# Altium PCB VCA.PcbDoc
Units mm, origin at the board's own origin, x right, y up, seen from the top; angles counter-clockwise.
Board outline 73 x 110 mm, 2 copper layers (Top Layer, Bottom Layer); 61 components, 35 nets, 170 pads, 0 vias.
Unrouted connection lines stored in the file: 34.
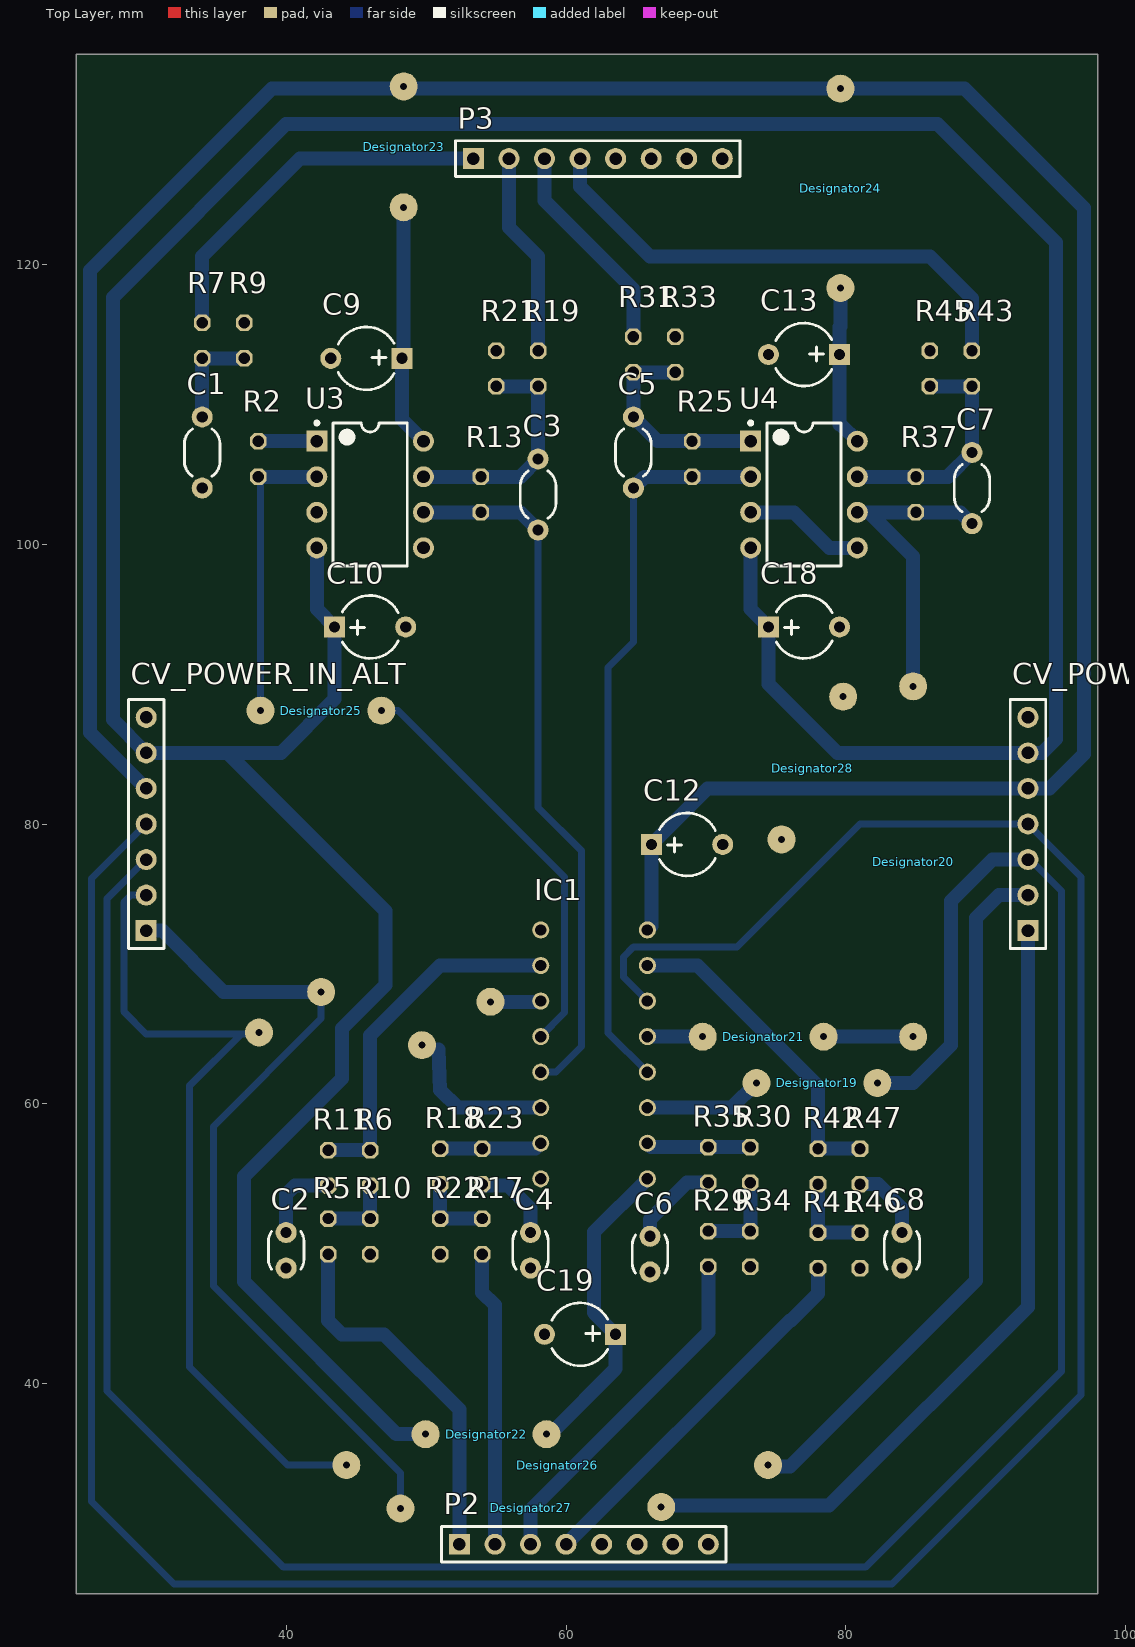
[diagram p0: Top Layer view]
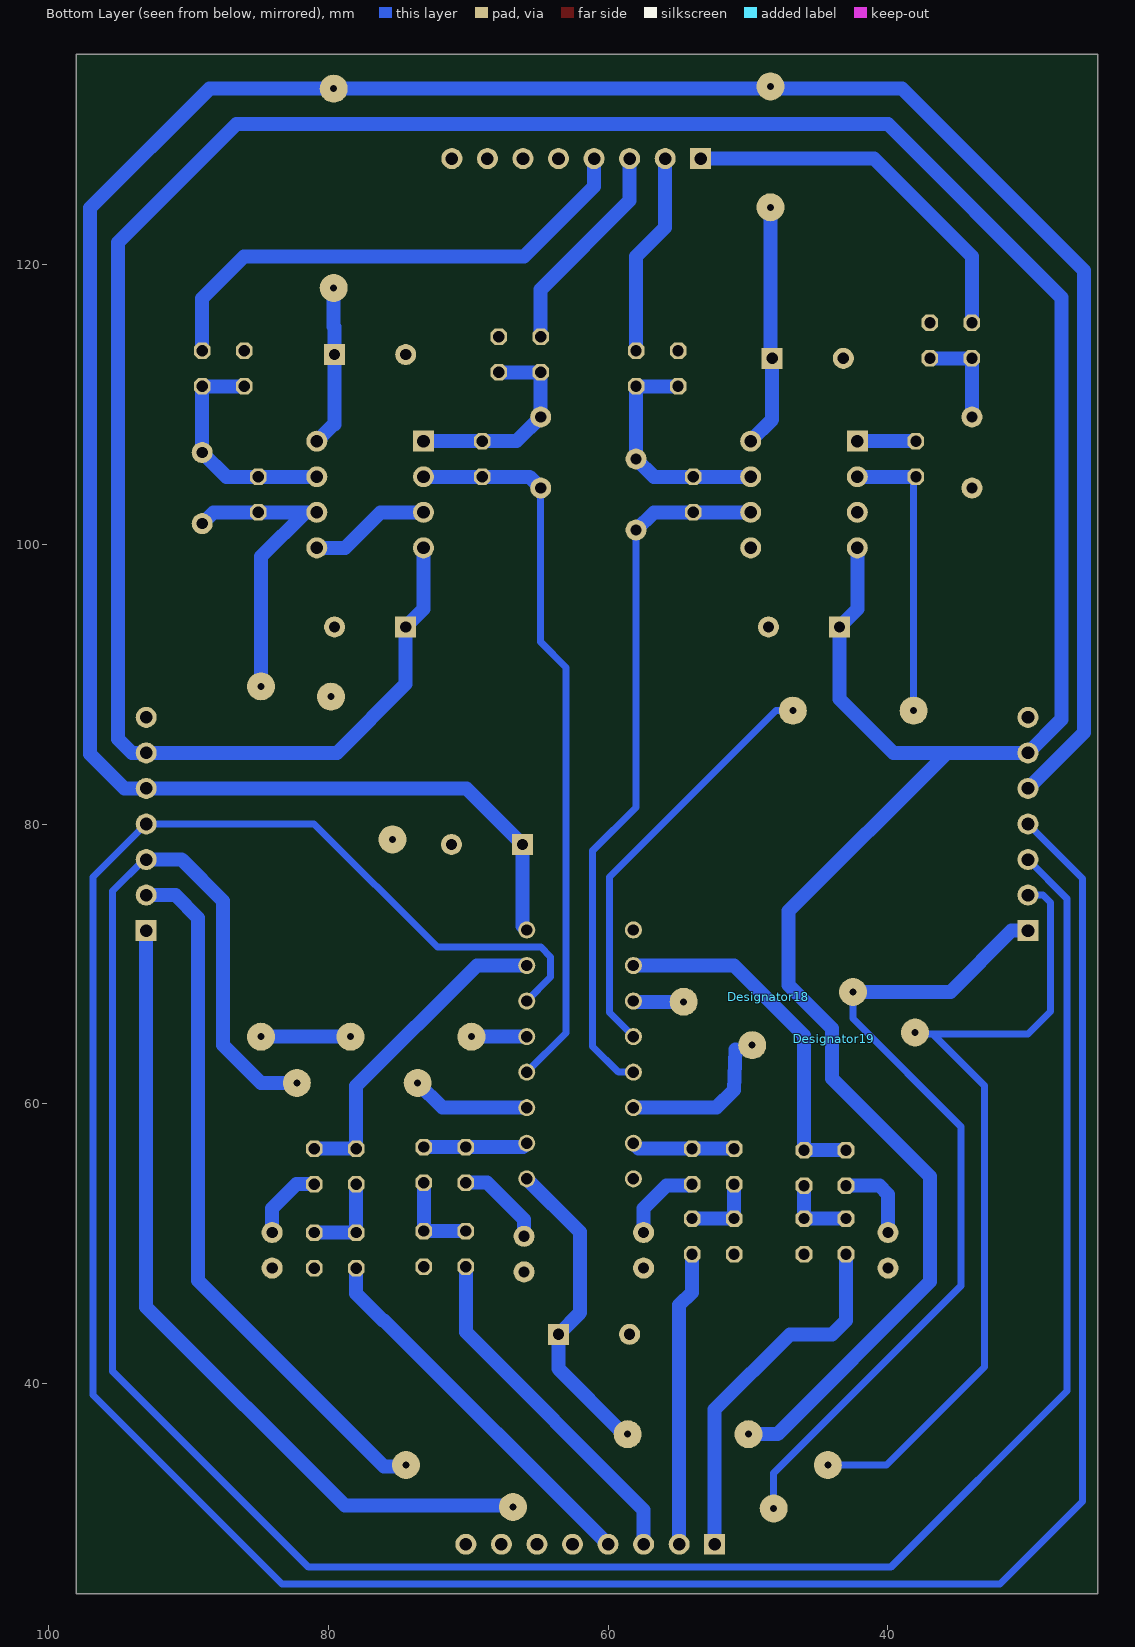
[diagram p1: Bottom Layer view, seen from below]

## Layer stack, top to bottom
Top Solder: solder mask 0.0102, Solder Resist, Dk 3.5
Top Layer: signal copper 0.0356
Dielectric 1: dielectric 0.32, FR-4, Dk 4.8
Bottom Layer: signal copper 0.0356
Bottom Solder: solder mask 0.0102, Solder Resist, Dk 3.5

## Board outline
25,25 25,135 98,135 98,25

## Design rules (kind name [scope] priority, off if disabled: settings)
Clearance Clearance_1 [InPolygon] p1: gap=0.5 ignorepadtopadclearanceinfootprint=FALSE
Clearance [All] p2: gap=0.254 ignorepadtopadclearanceinfootprint=FALSE except(0: Arc-Hole Track-Hole SMDPad-Hole THPad-Hole Via-Hole Fill-Hole Poly-Hole Region-Hole Text-Hole)
ComponentClearance [All] p1: gap=0 collisioncheckmode=3 verticalgap=0.254 showdistances=FALSE
PolygonConnect [All] p1: connectstyle=Relief reliefconductorwidth=0.254 reliefentries=4 polygonreliefangle="90 Angle" airgapwidth=0.254
RoutingVias [All] p1: holewidth=0.711 width=1.27 viastyle="Through Hole" minholewidth=0.711 minwidth=1.27 maxholewidth=0.711 maxwidth=1.27
SolderMaskExpansion [All] p1: expansion=0.102
Width [All] p1: maxlimit=2 minlimit=0.254 preferedwidth=1
29 further rules are at their usual default settings.

## Classes and differential pairs
component class VCA: C1 C2 C3 C4 C5 C6 C7 C8 C9 C10 C12 C13 C18 C19 CV_POWER_IN CV_POWER_IN_ALT IC1 P2 P3 R2 R5 R6 R7 R9 R10 R11 R13 R17 R18 R19 R21 R22 R23 R25 R29 R30 R31 R33 R34 R35 R37 R41 R42 R43 R45 R46 R47 U3 U4

## Components (designator, comment, footprint, x,y, rotation, side; value= is the part's Value field where it differs from the comment)
C1 "100pF" CAPRR508-254X381X584 34,106.54 r90 top
C2 "560pF" CAPRR254-254X381X381 40,49.54 r90 top
C3 "100pF" CAPRR508-254X381X584 58,103.54 r90 top
C4 "560pF" CAPRR254-254X381X381 57.46,49.54 r90 top
C5 "100pF" CAPRR508-254X381X584 64.81,106.54 r90 top
C6 "560pF" CAPRR254-254X381X381 66,49.27 r90 top
C7 "100pF" CAPRR508-254X381X584 89,104 r90 top
C8 "560pF" CAPRR254-254X381X381 84,49.54 r90 top
C9 "0.1uF" CAPPRB508-450x850 45.73,113.27 r180 top
C10 "0.1uF" CAPPRB508-450x850 46,94.08 r0 top
C12 "0.1uF" CAPPRB508-450x850 68.65,78.54 r0 top
C13 "0.1uF" CAPPRB508-450x850 77,113.54 r180 top
C18 "0.1uF" CAPPRB508-450x850 77,94.08 r0 top
C19 "0.1uF" CAPPRB508-450x850 61,43.54 r180 top
CV_POWER_IN "Header 7" HDR1X7 93,72.38 r90 top
CV_POWER_IN_ALT "Header 7" HDR1X7 30,72.38 r90 top
Designator18 "Comment" Jumper#1 51.136,68 r180 bottom
Designator19 "Comment" Jumper#2 73.6,61.5 r0 top
Designator19 "Comment" Jumper#3 46.7,65.1 r180 bottom
Designator20 "Comment" Jumper#4 84.8,81.2 r90 top
Designator21 "Comment" Jumper#2 78.4,64.8 r180 top
Designator22 "Comment" Jumper#2 58.6,36.4 r180 top
Designator23 "Comment" Jumper#2 48.4,132.7 r270 top
Designator24 "Comment" Jumper#5 79.6,118.3 r90 top
Designator25 "Comment" Jumper#2 46.8,88.1 r180 top
Designator26 "Comment" Jumper#6 74.436,34.2 r180 top
Designator27 "Comment" Jumper#7 56.8,31.1 r180 top
Designator28 "Comment" Jumper#8 79.8,89.1 r270 top
IC1 "SSM2164P" DIL16 62,63.54 r270 top
P2 "Header 8" HDR1X8 52.38,28.54 r0 top
P3 "Header 8" HDR1X8 53.38,127.54 r0 top
R2 "Res1" 0207/2V 38,106.08 r270 top value=1K
R5 "Res1" 0207/2V 43,50.54 r90 top value=1K
R6 "Res1" 0207/2V 46,55.43 r90 top value=1K
R7 "Res1" 0207/2V 34,114.54 r270 top value=1K
R9 "Res1" 0207/2V 37,114.54 r270 top value=1K
R10 "Res1" 0207/2V 46,50.54 r90 top value=1K
R11 "Res1" 0207/2V 43,55.43 r90 top value=1K
R13 "Res1" 0207/2V 53.92,103.54 r270 top value=1K
R17 "Res1" 0207/2V 54,50.54 r90 top value=1K
R18 "Res1" 0207/2V 51,55.54 r90 top value=1K
R19 "Res1" 0207/2V 58,112.54 r270 top value=1K
R21 "Res1" 0207/2V 55,112.54 r270 top value=1K
R22 "Res1" 0207/2V 51,50.54 r90 top value=1K
R23 "Res1" 0207/2V 54,55.54 r90 top value=1K
R25 "Res1" 0207/2V 69,106.08 r270 top value=1K
R29 "Res1" 0207/2V 70.16,49.65 r90 top value=1K
R30 "Res1" 0207/2V 73.16,55.65 r90 top value=1K
R31 "Res1" 0207/2V 64.81,113.54 r270 top value=1K
R33 "Res1" 0207/2V 67.81,113.54 r270 top value=1K
R34 "Res1" 0207/2V 73.16,49.65 r90 top value=1K
R35 "Res1" 0207/2V 70.16,55.65 r90 top value=1K
R37 "Res1" 0207/2V 85,103.54 r270 top value=1K
R41 "Res1" 0207/2V 78,49.54 r90 top value=1K
R42 "Res1" 0207/2V 78,55.54 r90 top value=1K
R43 "Res1" 0207/2V 89,112.54 r270 top value=1K
R45 "Res1" 0207/2V 86,112.54 r270 top value=1K
R46 "Res1" 0207/2V 81,49.54 r90 top value=1K
R47 "Res1" 0207/2V 81,55.54 r90 top value=1K
U3 "TL082CN" STM-N8 46,103.54 r0 top
U4 "TL082CN" STM-N8 77,103.54 r0 top

## Footprints (in the part's own frame and the unit in brackets; to place one, negate y for a bottom-side part, rotate by r counter-clockwise, add the part's x,y. Pads: shape width x height; smd on the part's side, far side on the other; paste and mask are expansions set on the pad)
0207/2V [mil]
  oct 46.48x46.48 / inner oct 60x60 / far side oct 46.48x46.48 hole 32: 1(-50,0) 2(50,0)
CAPPRB508-450x850 [mm] "Capacitor, Polarized Radial Bead, Pin spacing 5.08mm - Body Diameter 4.5mm X Body Height 8.5mm"
  rect 1.5x1.5 hole 0.8: 1(-2.54,0)
  round 1.5 hole 0.8: 2(2.54,0)
  silkscreen extent -1.98,-2.25 2.01,2.25, body extent -2.79,-2.25 2.79,2.25, height 8.97
CAPRR254-254X381X381 [mm] "Capacitor Radial Rounded, Pin spacing 2.54mm - Body With 2.54mm X Body Length 3.81mm X Body Height 3.81mm"
  round 1.5 hole 0.8: 1(-1.27,0) 2(1.27,0)
  silkscreen extent -1.35,-1.27 1.35,1.27, body extent -1.9,-1.27 1.91,1.27, height 3.81
CAPRR508-254X381X584 [mm] "Capacitor Radial Rounded (KEMET C317), Pin spacing 5.08mm - Body With 2.54mm X Body Length 3.81mm X Body Height 5.84mm"
  round 1.5 hole 0.8: 1(-2.54,0) 2(2.54,0)
  silkscreen extent -1.69,-1.27 1.69,1.27, body extent -2.79,-1.27 2.79,1.27, height 5.84
DIL16 [mil]
  round 48 / inner round 60 / far side round 48 hole 32: 1(-350,-150) 2(-250,-150) 3(-150,-150) 4(-50,-150) 5(50,-150) 6(150,-150) 7(250,-150) 8(350,-150) 9(350,150) 10(250,150) 11(150,150) 12(50,150) 13(-50,150) 14(-150,150) 15(-250,150) 16(-350,150)
HDR1X7 [mm] "Connector; Header; 7 Position"
  rect 1.5x1.5 hole 0.9: 1(0,0)
  round 1.5 hole 0.9: 2(2.54,0) 3(5.08,0) 4(7.62,0) 5(10.16,0) 6(12.7,0) 7(15.24,0)
  silkscreen extent -1.27,-1.27 16.51,1.27
HDR1X8 [mm] "Connector; Header; 8 Position"
  rect 1.5x1.5 hole 0.9: 1(0,0)
  round 1.5 hole 0.9: 2(2.54,0) 3(5.08,0) 4(7.62,0) 5(10.16,0) 6(12.7,0) 7(15.24,0) 8(17.78,0)
  silkscreen extent -1.27,-1.27 19.05,1.27
Jumper#1 [mm]
  round 2 hole 0.5: 1(-3.464,-0.7) 1(8.636,0)
Jumper#2 [mm]
  round 2 hole 0.5: 1(0,0) 1(8.636,0)
Jumper#3 [mm]
  round 2 hole 0.5: 1(-3,-0.9) 1(8.636,0)
Jumper#4 [mm]
  round 2 hole 0.5: 1(-16.4,0) 1(8.636,0)
Jumper#5 [mm]
  round 2 hole 0.5: 1(0,0) 1(14.24,0)
Jumper#6 [mm]
  round 2 hole 0.5: 1(0,0) 1(30.136,0)
Jumper#7 [mm]
  round 2 hole 0.5: 1(-10,-0.1) 1(8.636,0)
Jumper#8 [mm]
  round 2 hole 0.5: 1(0,0) 1(10.2,-4.4)
STM-N8 [mm] "DIP, 8-Leads, Body 10.15x7.1mm, Pitch 2.54mm"
  rect 1.5x1.5 hole 0.9: 1(-3.81,3.81)
  round 1.5 hole 0.9: 2(-3.81,1.27) 3(-3.81,-1.27) 4(-3.81,-3.81) 5(3.81,-3.81) 6(3.81,-1.27) 7(3.81,1.27) 8(3.81,3.81)
  silkscreen extent -3.93,-5.1 2.65,5.23, body extent -3.95,-5.07 3.95,5.07, height 5.33

## Part data
C1 C3 C5 C7: library part CCR_100PF_100V_5%_C0G_508-254X381X584, "Non-polarised capacitor", Case="LS5.08 W2.54 x L3.81 x H5.84", Manufacturer=GENERIC, Manufacturer1 ComponentHeight=5.84mm, Manufacturer1 Example=KEMET, Manufacturer1 Part Number=C317C101J1G5TA, Tolerance=±5%, Voltage=100VDC, Author="CERN DEM JLC", ComponentHeight=5.84mm, Component Type=Standard, CreateDate=17/12/2008, HelpURL=\\cern.ch\dfs\Applications\Altium\Datasheets\CCR_KEMET_C317.pdf, LatestRevisionDate=16/04/2015, Manufacturer Part Number=CCR_100PF_100V_5%_C0G_508-254X381X584, Mounted=Yes, Part Description="Radial Lead Type Multilayer Ceramic Capacitor", Part Number=CCR_100PF_100V_5%_C0G_508-254X381X584, Pin Count=2, Sense=No, SMD=No, Socket=No, Status=None, TC=C0G
C2 C4 C6 C8: library part CCR_560PF_100V_5%_C0G_254-254X381X381, "Non-polarised capacitor", Case="LS2.54 W2.54 x L3.81 x H3.81", Manufacturer=AVX, Manufacturer Part Number=SR151A561JAA, Tolerance=±5%, Voltage=100VDC, Author="CERN DEM JLC", ComponentHeight=3.81mm, Component Type=Standard, CreateDate=17/11/2010, HelpURL=\\cern.ch\dfs\Applications\Altium\Datasheets\CCR_AVX_SR15.pdf, LatestRevisionDate=16/04/2015, Mounted=Yes, Part Description="Radial Lead Type Multilayer Ceramic Capacitor", Part Number=CCR_560PF_100V_5%_C0G_254-254X381X381, Pin Count=2, Sense=No, SMD=No, Socket=No, Status=None, TC=C0G
C9 C10 C12 C13 C18 C19: library part CTEB_0.1UF_35V_10%_508-450X850, "Polarised capacitor", Case="LS5.08 D4.5 x H8.5", Manufacturer=AVX, Manufacturer Part Number=TAP104M035CCS-LF, Tolerance=±10%, Voltage=35V, Author="CERN DEM JLC", ComponentHeight=8.5mm, Component Type=Standard, CreateDate=19/08/2010, HelpURL=\\cern.ch\dfs\Applications\Altium\Datasheets\CTEB_AVX_TAP.pdf, LatestRevisionDate=19/08/2010, Mounted=Yes, Part Description="Solid Tantalum Resin Dipped Capacitor", Part Number=CTEB_0.1UF_35V_10%_508-450X850, Pin Count=2, Sense=No, SMD=No, Socket=No, Status=None
CV_POWER_IN CV_POWER_IN_ALT: "Header, 7-Pin", LatestRevisionDate=17-Jul-2002, LatestRevisionNote="Re-released for DXP Platform.", System=Connector
  CV_POWER_IN: Publisher="Altium Limited"
IC1: PACKAGE=DIL16, DeviceName=P, DeviceSetName=SSM2164, GateName_1=A, GateName_2=B, GateName_3=C, GateName_4=D, GateName_5=E, LibraryName=ssm2164_2, SymbolName_1=GAINCELL, SymbolName_2=GAINCELL, SymbolName_3=GAINCELL, SymbolName_4=GAINCELL, SymbolName_5=VCCBLK
P2 P3: "Header, 8-Pin", LatestRevisionDate=17-Jul-2002, LatestRevisionNote="Re-released for DXP Platform.", Publisher="Altium Limited"
R2 R5 R6 R7 R9 R10 R11 R13 R17 R18 R19 R21 R22 R23 R25 R29 R30 R31 R33 R34 R35 R37 R41 R42 R43 R45 R46 R47: "Resistor", LatestRevisionDate=17-Jul-2002, LatestRevisionNote="Re-released for DXP Platform.", PackageDescription="Axial Device, Thru-Hole; 2 Leads; 0.3 in Pin Spacing", PackageReference=AXIAL-0.3, Published=8-Jun-2000, Publisher="Altium Limited"
U3 U4: library part CMP-2000-07247-1, "General Purpose JFET Dual Operational Amplifier, 4 MHz, 6 to 36 V, 0 to 70 degC, 8-Pin DIP (N8), RoHS, Tube", Manufacturer=STMicroelectronics, Manufacturer Type=GeneralPurposeAmplifier, Maximum Dual Supply Voltage=18V, Maximum Input Bias Current=0.0004uA@15V, Maximum Input Offset Voltage=10mV@15V, Maximum Operating Temperature=70C, Maximum Power Dissipation=680mW, Maximum Supply Current=2.5mA@15V, Minimum Dual Supply Voltage=3V, Minimum Operating Temperature=0C, Package Description="8-Pin Double In-line Package, Body 9.59 x 6.605 mm, Pitch 2.54 mm", Package Reference=N8, Power Supply Type=Dual, Supplier_Package=PDIP, Typical Dual Supply Voltage=5V, Typical Input Noise Voltage Density=15nV/rtHz@15V, Typical Voltage Gain=106.02dB, Datasheet URL=https://datasheet.ciiva.com/19471/2002077-19471009.pdf, Datasheet Version="Rev. 10, 06/2008", Family=TL082, Manufacturer URL=http://www.st.com/, Minimum CMRR=70dB, Mounting=ThroughHole, Mounting Technology=ThroughHole, Number of Channels per Chip=2, Packaging=Tube, PartId=1, Pin_Count=8, Product Height=3.3mm, Product Length=9.27mm, Product Type=OPAmp, Product Width=6.35mm, Rail to Rail=No, Shut Down Support=No, Technology=BiFET, Type=GeneralPurposeAmplifier, Typical Gain Bandwidth Product=4MHz, Typical Slew Rate=16V/us@15V

## Nets (pads, with @x,y where several pads share a name; then routed paths per layer and width w, separated by ;. In a path a pad name is that pad's centre, name@x,y a point inside that pad or via, vN(x,y) a via of type N, cw(c..) or ccw(c..) an arc to the next point about the centre after c; other vN are vias at no path point)
+12V: C9.1 C12.1 C13.1 CV_POWER_IN.5 CV_POWER_IN_ALT.5 Designator23.1 Designator24.1 IC1.16 U3.8 U4.8 | length 226.3
  Bottom Layer w1: CV_POWER_IN_ALT.5 26,86.54 26,119.54 39,132.54 88.46,132.54 97,124 97,85 94.54,82.54 CV_POWER_IN.5 70.11,82.54 C12.1 66.11,72.73 IC1.16 ; Designator23.1@48.4,124.064 48.4,113.4 C9.1 48.27,108.89 U3.8 ; Designator24.1@79.6,118.3 79.6,115.56 79.54,115.5 C13.1 79.54,108.54 79.62,108.54 U4.8
-12V: C10.1 C18.1 C19.1 CV_POWER_IN.6 CV_POWER_IN_ALT.6 Designator22.1 IC1.9 U3.4 U4.4 | length 291
  Bottom Layer w1: U3.4 42.19,95.35 C10.1 43.46,88.92 39.62,85.08 35.8,85.08 ; Designator22.1@49.964,36.4 47.9,36.4 37,47.3 37,54.81 44,61.81 44,65.4 47.1,68.5 47.1,73.78 35.8,85.08 ; Designator22.1@59,36.54 63.54,41.08 C19.1 62,45.08 62,50.84 IC1.9 ; U4.4 73.19,95.35 C18.1 74.46,90 79.38,85.08 CV_POWER_IN.6 94,85.08 95,86.08 95,121.54 86.54,130 40,130 27.62,117.62 27.62,87.46 CV_POWER_IN_ALT.6 35.8,85.08
GND: C2.1 C4.1 C6.1 C8.1 C9.2 C10.2 C12.2 C13.2 C18.2 C19.2 CV_POWER_IN.7 CV_POWER_IN_ALT.7 Designator28.1 IC1.8 P2.5 P2.6 P2.7 P2.8 P3.5 P3.6 P3.7 P3.8 R9.1 R10.1 R21.1 R22.1 R33.1 R34.1 R45.1 R46.1 U3.3 U3.5 U4.3 U4.5 | length 8.7
  Bottom Layer w1: U4.3 76.27,102.27 78.81,99.73 U4.5
NetC1_1: C1.1 Designator25.1 IC1.4 R2.2 U3.2 | length 51.1
  Bottom Layer w0.5: R2.2 38.164,104.646 Designator25.1@38.164,88.1 ; Designator25.1@46.8,88.1 48,88.1 59.9,76.2 59.9,66.52 IC1.4
  Bottom Layer w1: R2.2 U3.2
NetC1_2: C1.2 R2.1 R7.2 R9.2 U3.1 | length 11.4
  Bottom Layer w1: C1.2 R7.2 R9.2 ; R2.1 U3.1
NetC2_2: C2.2 R11.1 | length 6
  Bottom Layer w1: C2.2 40,53.54 40.62,54.16 R11.1
NetC3_1: C3.1 IC1.5 R13.2 U3.6 | length 50.6
  Bottom Layer w0.5: C3.1 58,81.19 61.1,78.09 61.1,64.1 59.27,62.27 IC1.5
  Bottom Layer w1: U3.6 R13.2 56.73,102.27 C3.1
NetC3_2: C3.2 R13.1 R19.2 R21.2 U3.7 | length 16.9
  Bottom Layer w1: U3.7 R13.1 56.73,104.81 C3.2 R19.2 R21.2
NetC4_2: C4.2 R23.1 | length 5.9
  Bottom Layer w1: R23.1 54.11,54.16 55.84,54.16 57.46,52.54 C4.2
NetC5_1: C5.1 IC1.12 R25.2 U4.2 | length 52.4
  Bottom Layer w0.5: C5.1 64.81,93 63,91.19 63,65.08 IC1.12
  Bottom Layer w1: C5.1 65.62,104.81 R25.2 U4.2
NetC5_2: C5.2 R25.1 R31.2 R33.2 U4.1 | length 15.3
  Bottom Layer w1: R33.2 R31.2 C5.2 66.54,107.35 R25.1 U4.1
NetC6_2: C6.2 R35.1 | length 6.4
  Bottom Layer w1: C6.2 66,51.73 68.65,54.38 R35.1
NetC7_1: C7.1 Designator20.1 Designator21.1 IC1.13 R37.2 U4.6 | length 32.4
  Bottom Layer w1: IC1.13 69.754,64.81 Designator21.1@69.764,64.8 ; Designator21.1@78.4,64.8 Designator20.1@84.8,64.8 ; U4.6 81.63,102.27 ; Designator20.1@84.8,90.1 84.8,99.1 81.63,102.27 ; C7.1 88.19,102.27 R37.2 81.63,102.27
NetC7_2: C7.2 R37.1 R43.2 R45.2 U4.7 | length 16.6
  Bottom Layer w1: U4.7 R37.1 87.27,104.81 C7.2 R43.2 R45.2
NetC8_2: C8.2 R47.1 | length 5.4
  Bottom Layer w1: R47.1 82.27,54.27 84,52.54 C8.2
NetCV_POWER_IN_1: CV_POWER_IN.1 CV_POWER_IN_ALT.1 Designator18.1 Designator27.1 IC1.3 | length 122.6
  Bottom Layer w0.5: Designator18.1@42.5,68 42.5,66.1 34.8,58.4 34.8,47 48.164,33.636 Designator27.1@48.164,31.1
  Bottom Layer w1: CV_POWER_IN_ALT.1 31.16,72.38 35.54,68 Designator18.1@42.5,68 ; Designator18.1@54.6,67.3 58.14,67.3 IC1.3 ; Designator27.1@66.7,31.3 78.8,31.3 93,45.5 CV_POWER_IN.1
NetCV_POWER_IN_2: CV_POWER_IN.2 CV_POWER_IN_ALT.2 Designator19.1@38.064,65.1 Designator19.1@49.7,64.2 Designator26.1 IC1.6 | length 120.8
  Bottom Layer w0.5: CV_POWER_IN_ALT.2 28.92,74.92 28.4,74.4 28.4,66.6 30,65 36.8,65 ; Designator19.1@38.064,65.1 37.964,65 36.8,65 ; Designator26.1@44.3,34.2 40.1,34.2 33.1,41.2 33.1,61.3 36.8,65
  Bottom Layer w1: 50.9,63.9 51,61 52.27,59.73 IC1.6 ; Designator26.1@74.3,34.1 76,34.1 89.3,47.4 89.3,73.3 90.92,74.92 CV_POWER_IN.2
NetCV_POWER_IN_3: CV_POWER_IN.3 CV_POWER_IN_ALT.3 Designator19.1@73.6,61.5 Designator19.1@82.236,61.5 IC1.11 | length 187.9
  Bottom Layer w0.5: CV_POWER_IN_ALT.3 27.2,74.66 27.2,39.5 39.8,26.9 81.4,26.9 95.4,40.9 95.4,75.2 93.14,77.46 CV_POWER_IN.3
  Bottom Layer w1: IC1.11 71.83,59.73 Designator19.1@73.6,61.5 ; Designator19.1@82.236,61.5 84.8,61.5 87.5,64.2 87.5,74.5 90.46,77.46 CV_POWER_IN.3
NetCV_POWER_IN_4: CV_POWER_IN.4 CV_POWER_IN_ALT.4 IC1.14 | length 207.8
  Bottom Layer w0.5: CV_POWER_IN_ALT.4 26.1,76.1 26.1,31.6 32,25.7 83.3,25.7 96.8,39.2 96.8,76.2 CV_POWER_IN.4 81,80 72.2,71.2 64.8,71.2 64.1,70.5 64.1,69.06 IC1.14
NetIC1_2: IC1.2 R6.2 R11.2 | length 25.5
  Bottom Layer w1: R11.2 R6.2 46,64.89 51,69.89 IC1.2
NetIC1_7: IC1.7 R18.2 R23.2 | length 7.3
  Bottom Layer w1: R18.2 R23.2 57.81,56.81 IC1.7
NetIC1_10: IC1.10 R30.2 R35.2 | length 7.5
  Bottom Layer w1: IC1.10 66.08,56.92 R35.2 R30.2
NetIC1_15: IC1.15 R42.2 R47.2 | length 23.2
  Bottom Layer w1: IC1.15 69.38,69.89 78,61.27 R42.2 R47.2
NetP2_1: P2.1 R5.1 | length 26.4
  Bottom Layer w1: R5.1 43,44.54 44,43.54 47,43.54 52.38,38.16 P2.1
NetP2_2: P2.2 R17.1 | length 21.1
  Bottom Layer w1: R17.1 54,46.54 54.92,45.62 P2.2
NetP2_3: P2.3 R29.1 | length 25.1
  Bottom Layer w1: P2.3 57.46,31 70.16,43.7 R29.1
NetP2_4: P2.4 R41.1 | length 27.2
  Bottom Layer w1: P2.4 76,44.54 76.08,44.54 78,46.46 R41.1
NetP3_1: P3.1 R7.1 | length 27
  Bottom Layer w1: R7.1 34,120.54 41,127.54 P3.1
NetP3_2: P3.2 R19.1 | length 14.6
  Bottom Layer w1: P3.2 55.92,122.62 58,120.54 R19.1
NetP3_3: P3.3 R31.1 | length 15.4
  Bottom Layer w1: P3.3 58.46,124.54 64.81,118.19 R31.1
NetP3_4: P3.4 R43.1 | length 37
  Bottom Layer w1: P3.4 61,125.54 66,120.54 86,120.54 89,117.54 R43.1
NetR5_2: R5.2 R6.1 R10.2 | length 5.4
  Bottom Layer w1: R5.2 R10.2 R6.1
NetR17_2: R17.2 R18.1 R22.2 | length 5.5
  Bottom Layer w1: R18.1 R22.2 R17.2
NetR29_2: R29.2 R30.1 R34.2 | length 6.5
  Bottom Layer w1: R29.2 R34.2 R30.1
NetR41_2: R41.2 R42.1 R46.2 | length 6.5
  Bottom Layer w1: R42.1 R41.2 R46.2
pads on no net: IC1.1

## Polygon pours and split planes (outlines as drawn)
GND on Bottom Layer "GND" (solid, pour order 2): 147.75,92